# Altium PCB hackster.PcbDoc
Units mil, origin at the board's own origin, x right, y up, seen from the top; angles counter-clockwise.
Board outline 2905 x 2450 mil, 2 copper layers (Top Layer, Bottom Layer); 8 components, 0 nets, 27 pads, 0 vias.
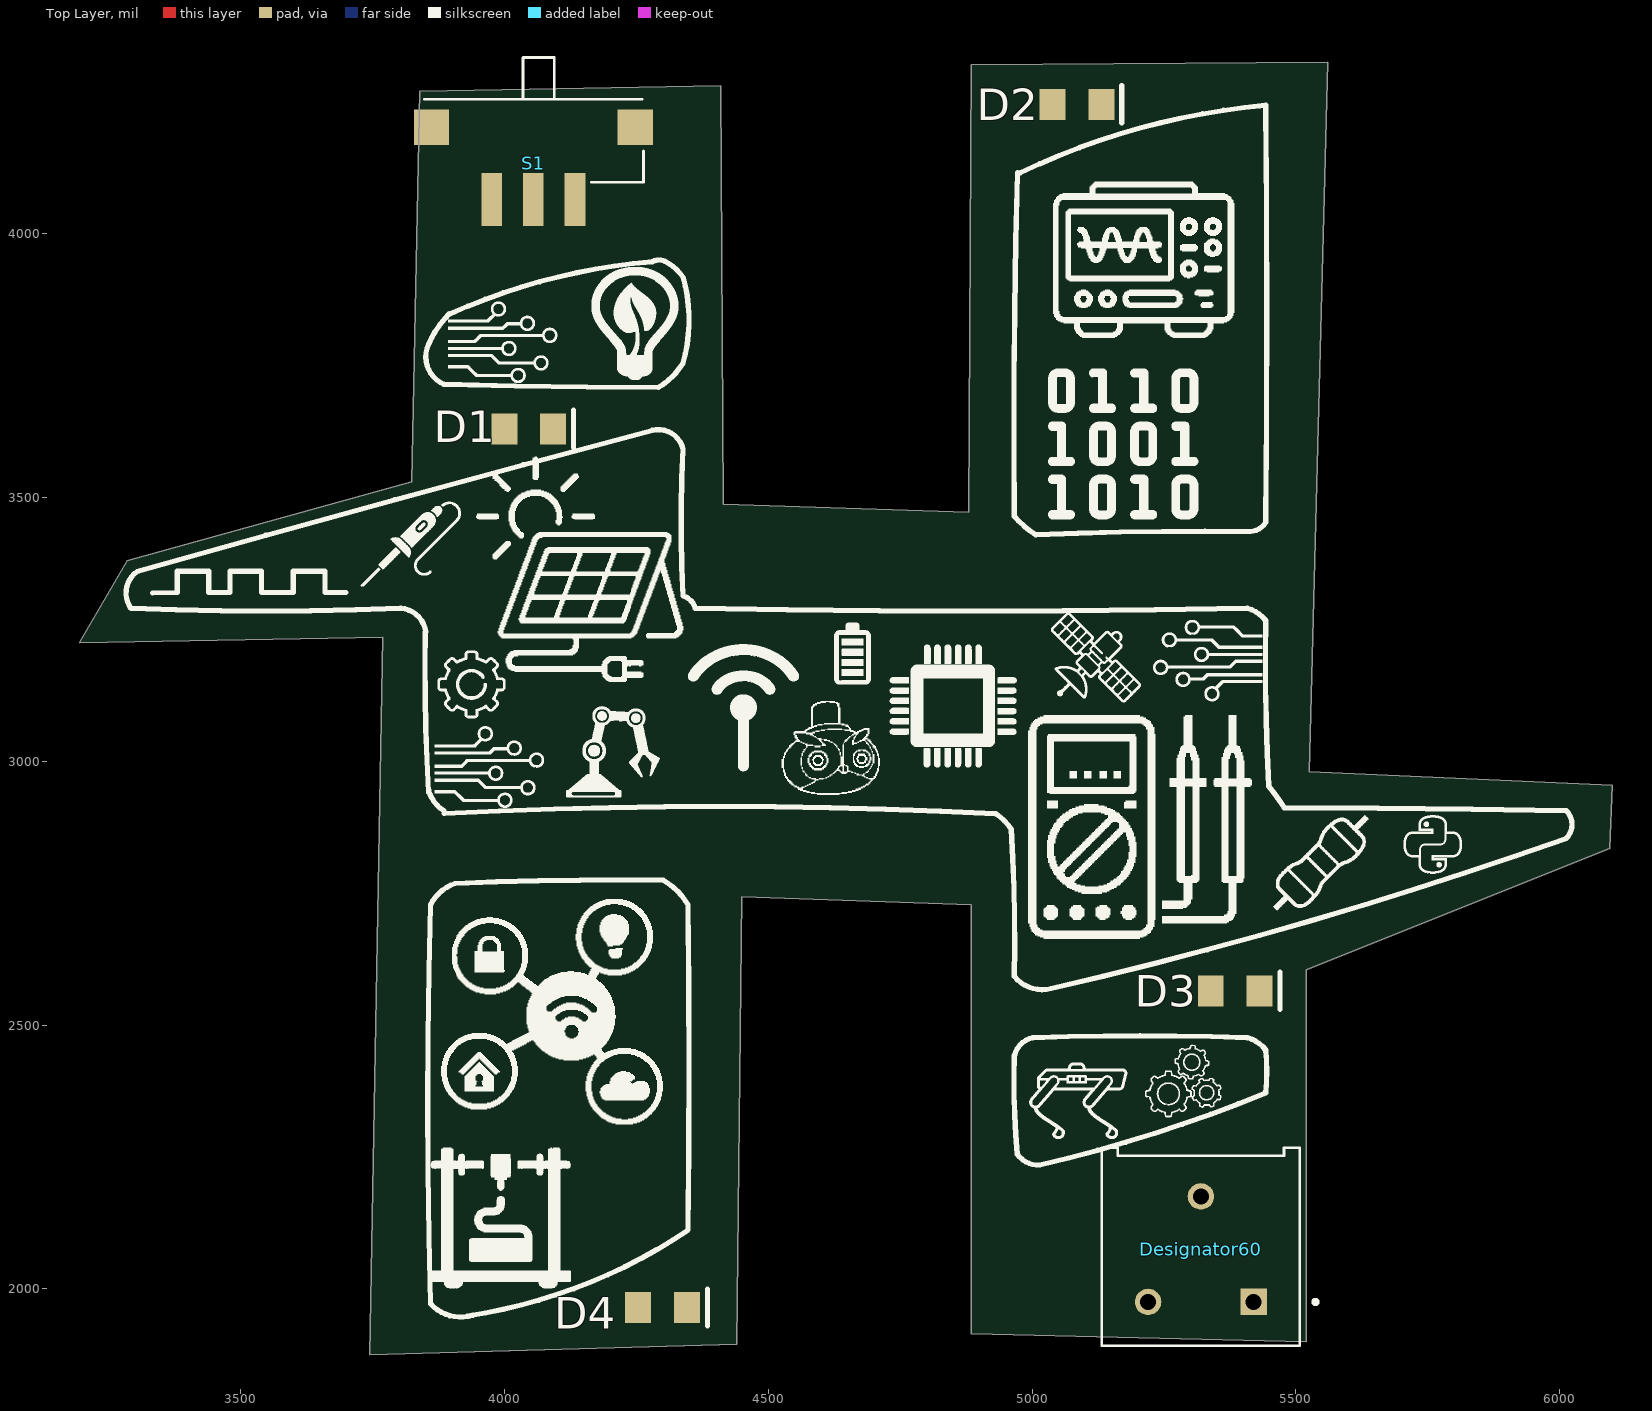
[diagram p0: Top Layer view]
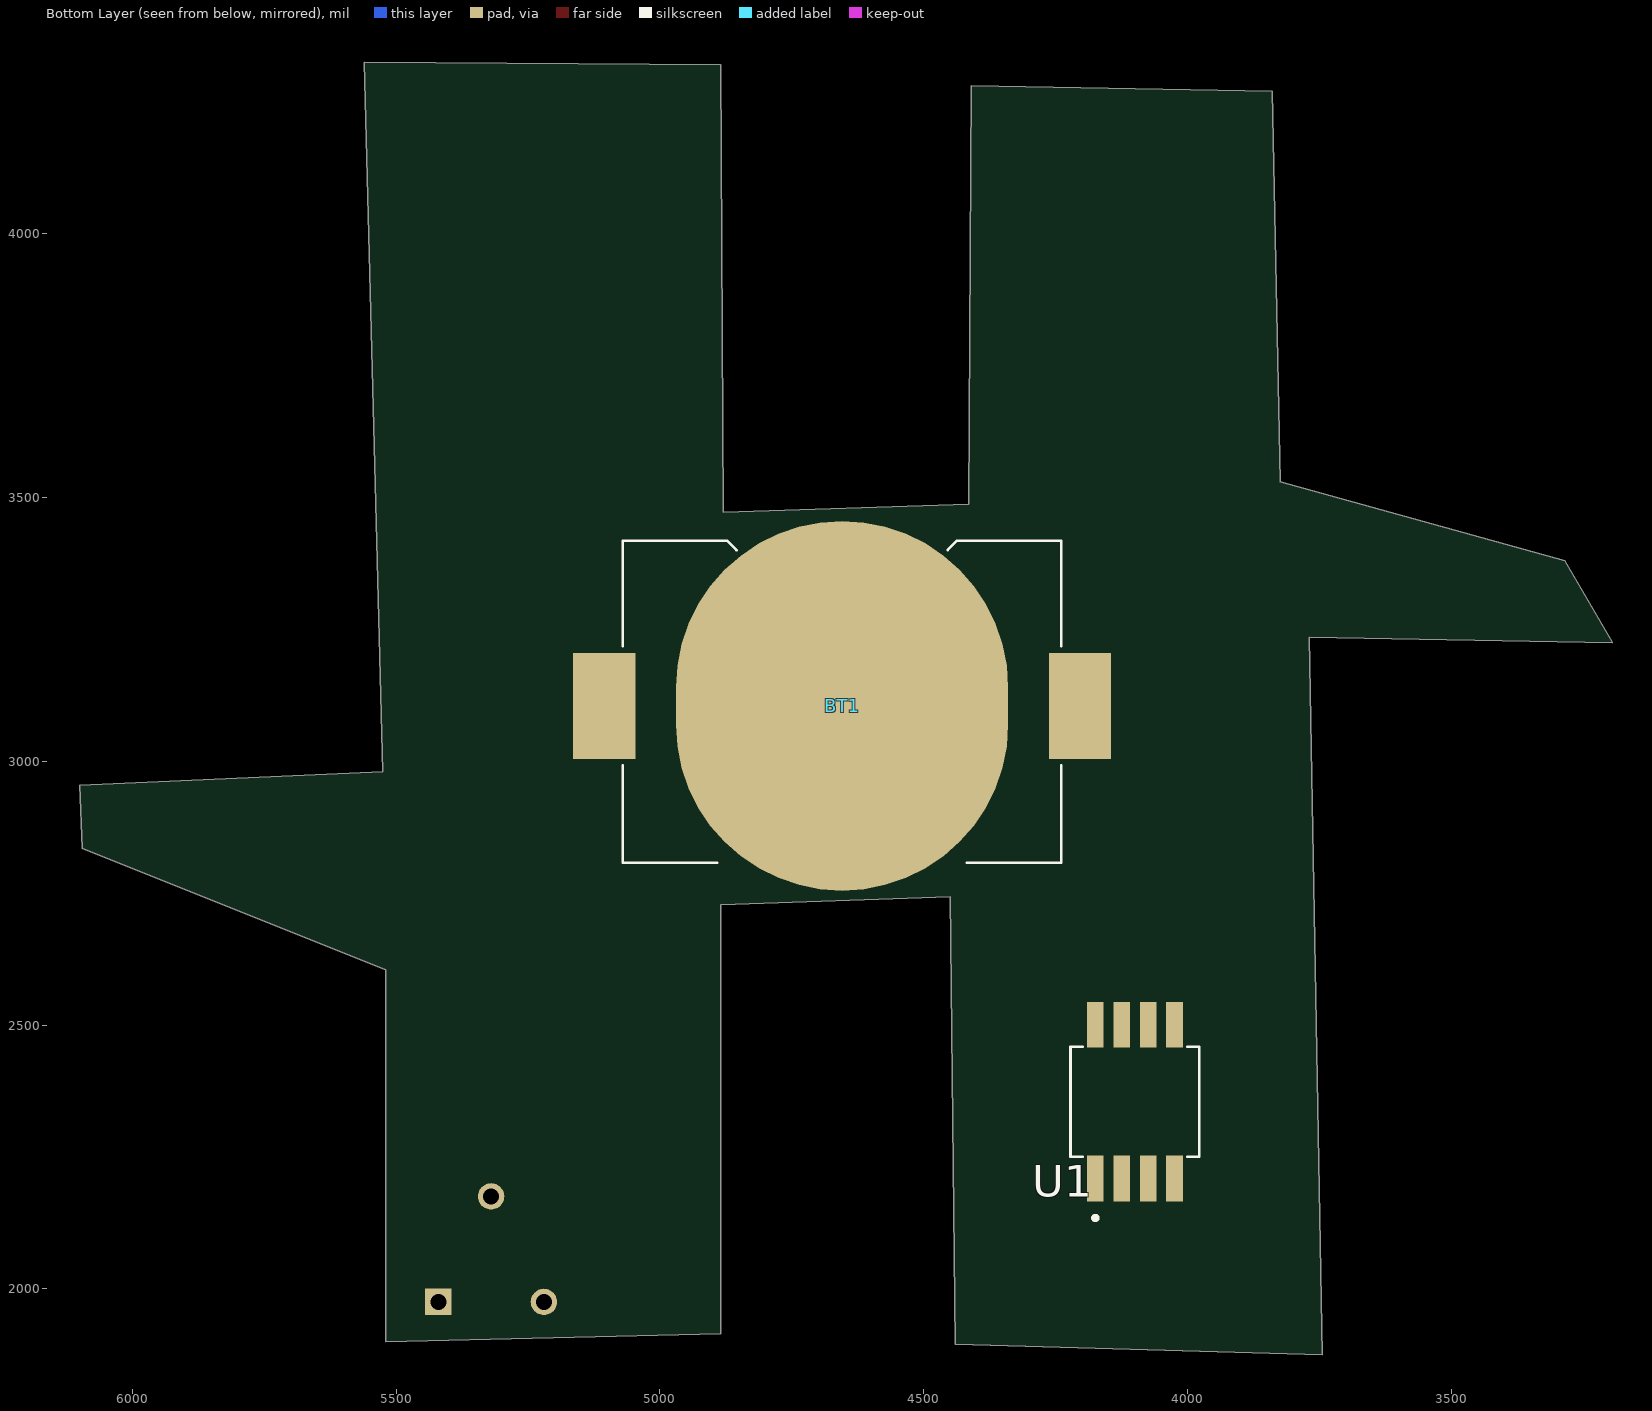
[diagram p1: Bottom Layer view, seen from below]

## Layer stack, top to bottom
Top Solder: solder mask 0.4, Solder Resist, Dk 3.5
Top Layer: signal copper 1.4
Dielectric 1: dielectric 12.6, FR-4, Dk 4.8
Bottom Layer: signal copper 1.4
Bottom Solder: solder mask 0.4, Solder Resist, Dk 3.5

## Board outline
3745,1875 3770,3235 3195,3225 3285,3380 3825,3530 3840,4270 4410,4280 4414.58,3487.11 4880.39,3472.08 4885,4320 5560,4325 5525,2980 6100,2955 6095,2835 5520,2605 5520,1900 4885,1915 4885,2727.93 4449.64,2742.94 4440,1895

## Design rules (kind name [scope] priority, off if disabled: settings)
Clearance [All] p1: gap=10 ignorepadtopadclearanceinfootprint=FALSE except(0: Arc-Hole Track-Hole SMDPad-Hole THPad-Hole Via-Hole Fill-Hole Poly-Hole Region-Hole Text-Hole)
PolygonConnect [All] p1: connectstyle=Relief reliefconductorwidth=10 reliefentries=4 polygonreliefangle="90 Angle" airgapwidth=10
RoutingVias [All] p1: holewidth=28 width=50 viastyle="Through Hole" minholewidth=28 minwidth=50 maxholewidth=28 maxwidth=50
SolderMaskExpansion [All] p1: expansion=4 istentingtop=FALSE
Width [All] p1: maxlimit=10 minlimit=10 preferedwidth=10
30 further rules are at their usual default settings.

## Components (designator, comment, footprint, x,y, rotation, side; value= is the part's Value field where it differs from the comment)
BT1 "BAT-HLD-001" BAT_BAT-HLD-001 4655,3105 r0 bottom
D1 "Comment" LED_APT2012LVBC_D 4046.26,3630 r180 top
D2 "Comment" LED_APT2012LVBC_D 5085,4245 r180 top
D3 "Comment" LED_APT2012LVBC_D 5385,2565 r180 top
D4 "Comment" LED_APT2012LVBC_D 4300,1965 r180 top
Designator60 "Comment" TRIM_3386F-1-103TLF 5320,2080 r180 top
S1 "EG1270" SW_SS312SAH4-R 4055,4125 r270 top
U1 "Comment" IC_TLC555CPSR 4100,2355 r90 bottom

## Footprints (in the part's own frame and the unit in brackets; to place one, negate y for a bottom-side part, rotate by r counter-clockwise, add the part's x,y. Pads: shape width x height; smd on the part's side, far side on the other; paste and mask are expansions set on the pad)
BAT_BAT-HLD-001 [mm]
  oval 16x17.8 smd paste-10: N1(0,0)
  rect 3x5.1 smd: P1(-11.45,0) P2(11.45,0)
  silkscreen extent -10.55,-7.95 10.55,7.55, body extent -11.43,-7.75 11.43,7.75, height 4.32
IC_TLC555CPSR [mm]
  rect 2.2x0.8 smd paste-0.025 mask+0.2: 1(-3.7,1.905) 2(-3.7,0.635) 3(-3.7,-0.635) 4(-3.7,-1.905) 5(3.7,-1.905) 6(3.7,-0.635) 7(3.7,0.635) 8(3.7,1.905)
  silkscreen extent -5.7,-3.1 2.65,3.1, body extent -3.9,-3.1 3.9,3.1, height 2
LED_APT2012LVBC_D [mm]
  rect 1.25x1.5 smd: 1(-1.175,0) 2(1.175,0)
  silkscreen extent -2.16,-0.89 -2.16,0.89, body extent -1.15,-0.7 1.15,0.7, height 1.3
SW_SS312SAH4-R [mm]
  rect 2.55x1 smd: 1(1.525,-2) 2(1.525,0) 3(1.525,2)
  rect 1.7x1.7 smd: P$1(-1.95,-4.9) P$2(-1.95,4.9)
  silkscreen extent -5.3,-5.25 0.7,5.3, body extent -5.14,-5.37 2.25,5.12, height 3.05
TRIM_3386F-1-103TLF [mm]
  rect 1.268x1.268 / inner round 1.268 / far side rect 1.268x1.268 hole 0.76: 1(-2.54,2.655)
  round 1.268 hole 0.76: 2(0,-2.425) 3(2.54,2.655)
  silkscreen extent -5.62,-4.76 4.76,4.76, body extent -4.76,-4.76 4.76,4.76, height 4.83

## Part data
BT1: "Battery Retainer Coin, 20.0mm 1 Cell SMD (SMT) Tab", Package=None, Availability=Unavailable, MP=BAT-HLD-001, Price=None
S1: "Slide Switch SPDT Through Hole, Right Angle", Package=None, Availability="In Stock", Check_prices=https://www.snapeda.com/parts/EG1270/E-Switch/view-part/?ref=eda, MF=E-Switch, MP=EG1270, Price=None, Purchase-URL=https://pricing.snapeda.com/search/part/EG1270/?ref=eda, SnapEDA_Link=https://www.snapeda.com/parts/EG1270/E-Switch/view-part/?ref=snap

## Nets (pads, with @x,y where several pads share a name; then routed paths per layer and width w, separated by ;. In a path a pad name is that pad's centre, name@x,y a point inside that pad or via, vN(x,y) a via of type N, cw(c..) or ccw(c..) an arc to the next point about the centre after c; other vN are vias at no path point)
pads on no net: BT1.N1 BT1.P1 BT1.P2 D1.1 D1.2 D2.1 D2.2 D3.1 D3.2 D4.1 D4.2 Designator60.1 Designator60.2 Designator60.3 S1.1 S1.2 S1.3 S1.P$1 S1.P$2 U1.1 U1.2 U1.3 U1.4 U1.5 U1.6 U1.7 U1.8

## Silkscreen, mask and mechanical layers (free items; w line width, h text height)
Top Overlay:
  drawing of 203 lines, arcs and shapes, not listed
Mechanical 13:
  lines w10: 3195,3225 3285,3380 3825,3530 3840,4270 4410,4280 4414.63,3479.53 4880.35,3464.5 4885,4320 5560,4325 5525,2980 6100,2955 6095,2835 5520,2605 5520,1900 4885,1915 4885,2726.03 4449.61,2741.05 4440,1895 3745,1875 3770,3235 3195,3225